# Altium PCB PCB1.PcbDoc
Units mil, origin at the board's own origin, x right, y up, seen from the top; angles counter-clockwise.
Board outline 6000 x 4000 mil, 2 copper layers (Top Layer, Bottom Layer); 12 components, 32 nets, 29 pads, 0 vias.
Unrouted connection lines stored in the file: 15.
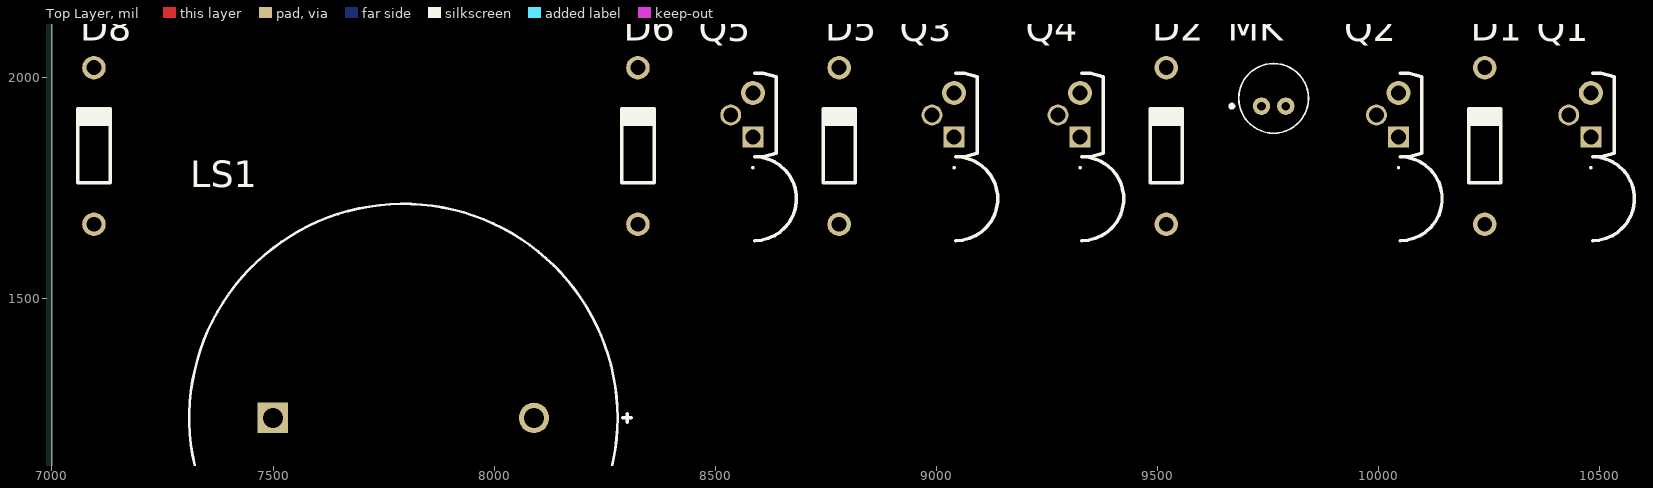
[diagram p0: Top Layer view]
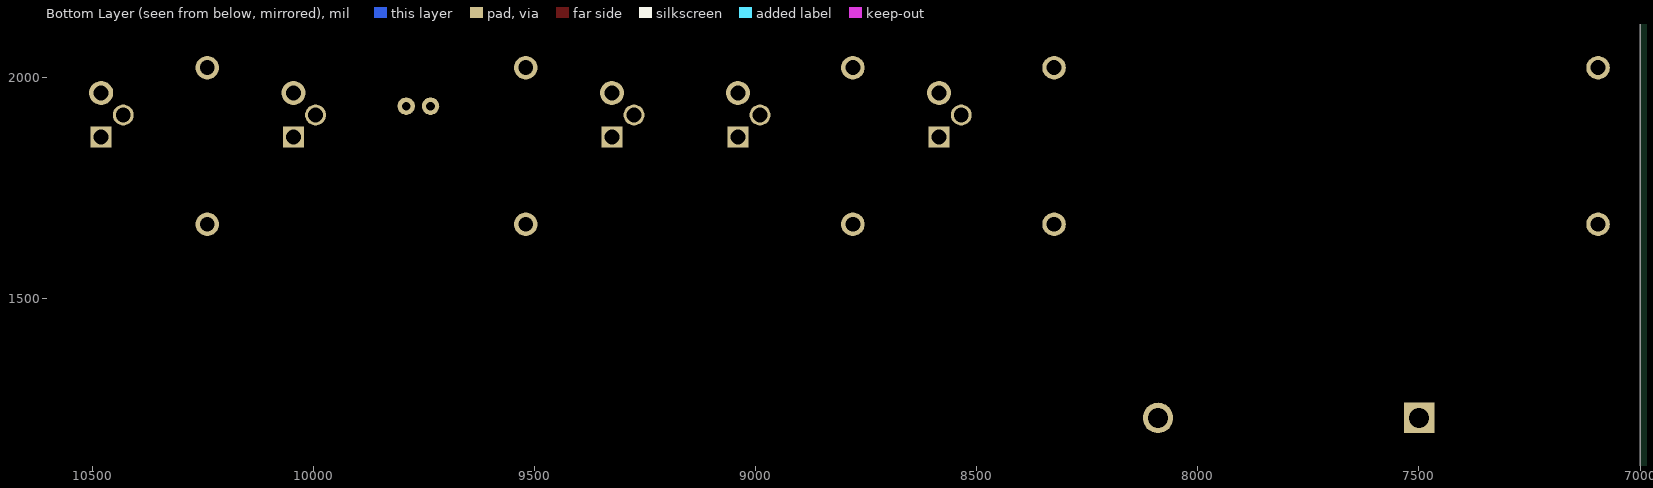
[diagram p1: Bottom Layer view, seen from below]

## Layer stack, top to bottom
Top Solder: solder mask 0.4, Solder Resist, Dk 3.5
Top Layer: signal copper 1.4
Dielectric 1: dielectric 12.6, FR-4, Dk 4.8
Bottom Layer: signal copper 1.4
Bottom Solder: solder mask 0.4, Solder Resist, Dk 3.5

## Board outline
1000,1000 7000,1000 7000,5000 1000,5000

## Design rules (kind name [scope] priority, off if disabled: settings)
Clearance [All] p1: gap=10 ignorepadtopadclearanceinfootprint=FALSE
PolygonConnect [All] p1: connectstyle=Relief reliefconductorwidth=10 reliefentries=4 polygonreliefangle="90 Angle" airgapwidth=10
RoutingVias [All] p1: holewidth=28 width=50 viastyle="Through Hole" minholewidth=28 minwidth=50 maxholewidth=28 maxwidth=50
SolderMaskExpansion [All] p1: expansion=4 istentingtop=FALSE
SupplyNets "Schematic Supply Nets" [InNet('GND')] p1: voltage=0.000
Width [All] p1: maxlimit=10 minlimit=10 preferedwidth=10
30 further rules are at their usual default settings.

## Components (designator, comment, footprint, x,y, rotation, side; value= is the part's Value field where it differs from the comment)
D1 "1N4148" NXP-SOD27-2_V 10240,1845 r90 top
D2 "1N4148" NXP-SOD27-2_V 9520,1845 r90 top
D5 "1N4148" NXP-SOD27-2_V 8780,1845 r90 top
D6 "1N4148" NXP-SOD27-2_V 8325,1845 r90 top
D8 "1N4148" NXP-SOD27-2_V 7095,1845 r90 top
LS1 "PKB24SPCH3601-B0" FP-PKB24SPCH3601-B0-MFG 7794.72,1230 r0 top
MK "MO044402-3" MO0444023 9735,1935 r0 top
Q1 "BC547BG" BC547BG 10480,1865 r90 top
Q2 "BC547BG" BC547BG 10045,1865 r90 top
Q3 "BC547BG" BC547BG 9040,1865 r90 top
Q4 "BC547BG" BC547BG 9325,1865 r90 top
Q5 "BC547BG" BC547BG 8585,1865 r90 top

## Footprints (in the part's own frame and the unit in brackets; to place one, negate y for a bottom-side part, rotate by r counter-clockwise, add the part's x,y. Pads: shape width x height; smd on the part's side, far side on the other; paste and mask are expansions set on the pad)
BC547BG [mm]
  rect 1.2x1.2 hole 0.85: 1(0,0)
  round 1.2 hole 0.85: 2(1.27,1.27)
  round 1.381 hole 0.85: 3(2.54,0)
  silkscreen extent -5.94,-2.5 3.68,0.05, body extent -3.87,-2.51 1.33,1.68, height 8.33
FP-PKB24SPCH3601-B0-MFG [mm]
  rect 1.75x1.75 hole 1.15 paste-2539.97 mask+0: 1(-7.5,0)
  round 1.75 hole 1.15 paste-2539.97 mask+0: 2(7.5,0)
  silkscreen extent -12.3,-12.3 13.1,12.3, body extent -12.4,-12.4 12.4,12.4, height 0.25
MO0444023 [mm]
  round 1 hole 0.5: 1(0,0) 2(1.4,0)
  silkscreen extent -1.8,-1.55 2.7,2.45, body extent -1.3,-1.54 2.7,2.44, height 1.4
NXP-SOD27-2_V [mm] "SOD27, 2-Leads, Dia 1.85mm, Body Length 4.25mm, Pin Spacing 9mm"
  round 1.35 hole 0.85: 1(-4.5,0) 2(4.5,0)
  silkscreen extent -2.12,-0.93 2.13,0.92, body extent -4.78,-0.92 4.78,0.92, height 1.84

## Part data
D1 D2 D5 D6 D8: library part CMP-0648-00002-1, "High-speed Diode, 100 V, 450 mA, 2-Pin SOD27, RoHS", Manufacturer="NXP Semiconductors", Cd="4 pF Max.", ComponentLink1Description="Manufacturer URL", ComponentLink1URL=http://www.nxp.com/, ComponentLink2Description=Datasheet, ComponentLink2URL=http://www.nxp.com/documents/data_sheet/1N4148_1N4448.pdf, ComponentLink3Description="Package Specification", ComponentLink3URL=http://www.nxp.com/documents/data_sheet/1N4148_1N4448.pdf, Configuration=Single, DatasheetVersion=Aug-04, IF="200 mA Max.", IFRM="450 mA", IFSM="4 A Max.", IR (VR="20 V)=25 nA", Mounting Technology="Through Hole", PackageDescription="2-Pin Hermetically Sealed Glass Package, Axial Leaded, Dia 1.85 mm, Body Length 4.25 mm, Lead Spread 25.4 mm", PackageReference=SOD27, PackageVersion=Aug-04, PartNumber=1N4148, RoHS=TRUE, Trr="4 ns Max.", VF (IF="10 mA)=1 V", VR="100 V Max."
LS1: library part CMP-06203-000001-2, "AUDIO PIEZO TRANSDUCER 3-15V TH", Frequency=3.6kHz, Max Frequency=4.1kHz, Max Operating Temperature=70°C, Max Supply Current=16mA, Max Supply Voltage=15V, Min Operating Temperature=-20°C, Min Supply Voltage=3V, Nominal Supply Voltage (DC)=12V, Package Quantity=650, Diameter=24.3mm, Height=9.7mm, Lead Free="Lead Free", Length=24.3mm, Max Supply Voltage (DC)=15V, Min Supply Voltage (DC)=3V, Mount=Flush, Nominal Supply Current=16mA, Operating Supply Current=16mA, Packaging=Bulk, Radiation Hardening=No, REACH SVHC="No SVHC", Self Resonant Frequency=3.6kHz, Termination="PC Pins", Voltage Rating=12V, Voltage Rating (DC)=15V, Washable=No
MK: "Microphone", Manufacturer_Name="DB Unlimited", Mouser Part Number=497-MO044402-3, Arrow Part Number=MO044402-3, Arrow Price/Stock=https://www.arrow.com/en/products/mo044402-3/db-unlimited?region=nac, Datasheet Link=https://www.dbunlimitedco.com/images/product_images/2D-Drawings/MO044402-3.pdf, Height=1.3mm, Manufacturer_Part_Number=MO044402-3, Mouser Price/Stock=https://www.mouser.co.uk/ProductDetail/DB-Unlimited/MO044402-3?qs=t9M3m0YJX4P%252B6U8YhOQ9OQ%3D%3D
Q1 Q2 Q3 Q4 Q5: "Transistor BJT NPN", Manufacturer_Name=onsemi, Mouser Part Number=N/A, Arrow Part Number=BC547BG, Arrow Price/Stock=http://www.arrow.com/en/products/bc547bg/on-semiconductor, Datasheet Link=https://www.onsemi.com/download/data-sheet/pdf/BC546-D.PDF, Height=5.33mm, Manufacturer_Part_Number=BC547BG, Mouser Price/Stock=http://www.mouser.com/Search/ProductDetail.aspx?qs=NSmgnqlvnz5NIKIycfR5CQ%3d%3d

## Nets (pads, with @x,y where several pads share a name; then routed paths per layer and width w, separated by ;. In a path a pad name is that pad's centre, name@x,y a point inside that pad or via, vN(x,y) a via of type N, cw(c..) or ccw(c..) an arc to the next point about the centre after c; other vN are vias at no path point)
GND: D2.1 D6.1 LS1.1 MK.1 MK.2 Q1.3 Q2.2 Q2.3 Q3.3 Q4.3 Q5.2 Q5.3
NetC1_1: Q2.1
NetC1_2: D1.1 D2.2
NetC2_2: D1.2 Q1.2
NetC3_2: 
NetC4_2: 
NetC5_2: 
NetC6_2: 
NetC7_1: Q5.1
NetC7_2: D5.1 D6.2
NetC8_2: D5.2 Q3.2
NetC9_2: 
NetC10_2: 
NetC12_2: D8.2
NetC13_2: 
NetD3_1: 
NetD4_1: 
NetD7_1: 
NetD8_1: D8.1
NetD9_1: 
NetLS1_2: LS1.2
NetQ1_1: Q1.1
NetQ3_1: Q3.1
NetQ4_1: Q4.1
NetQ4_2: Q4.2
NetR1_2: 
NetR3_2: 
NetR6_2: 
NetR12_2: 
NetR15_2: 
NetV1_2: 
NetV2_2: 